# Altium PCB USB_Booster.pcbdoc
Units mil, origin at the board's own origin, x right, y up, seen from the top; angles counter-clockwise.
Board outline 2290 x 2255 mil, 2 copper layers (Top Layer, Bottom Layer); 9 components, 12 nets, 60 pads, 8 vias.
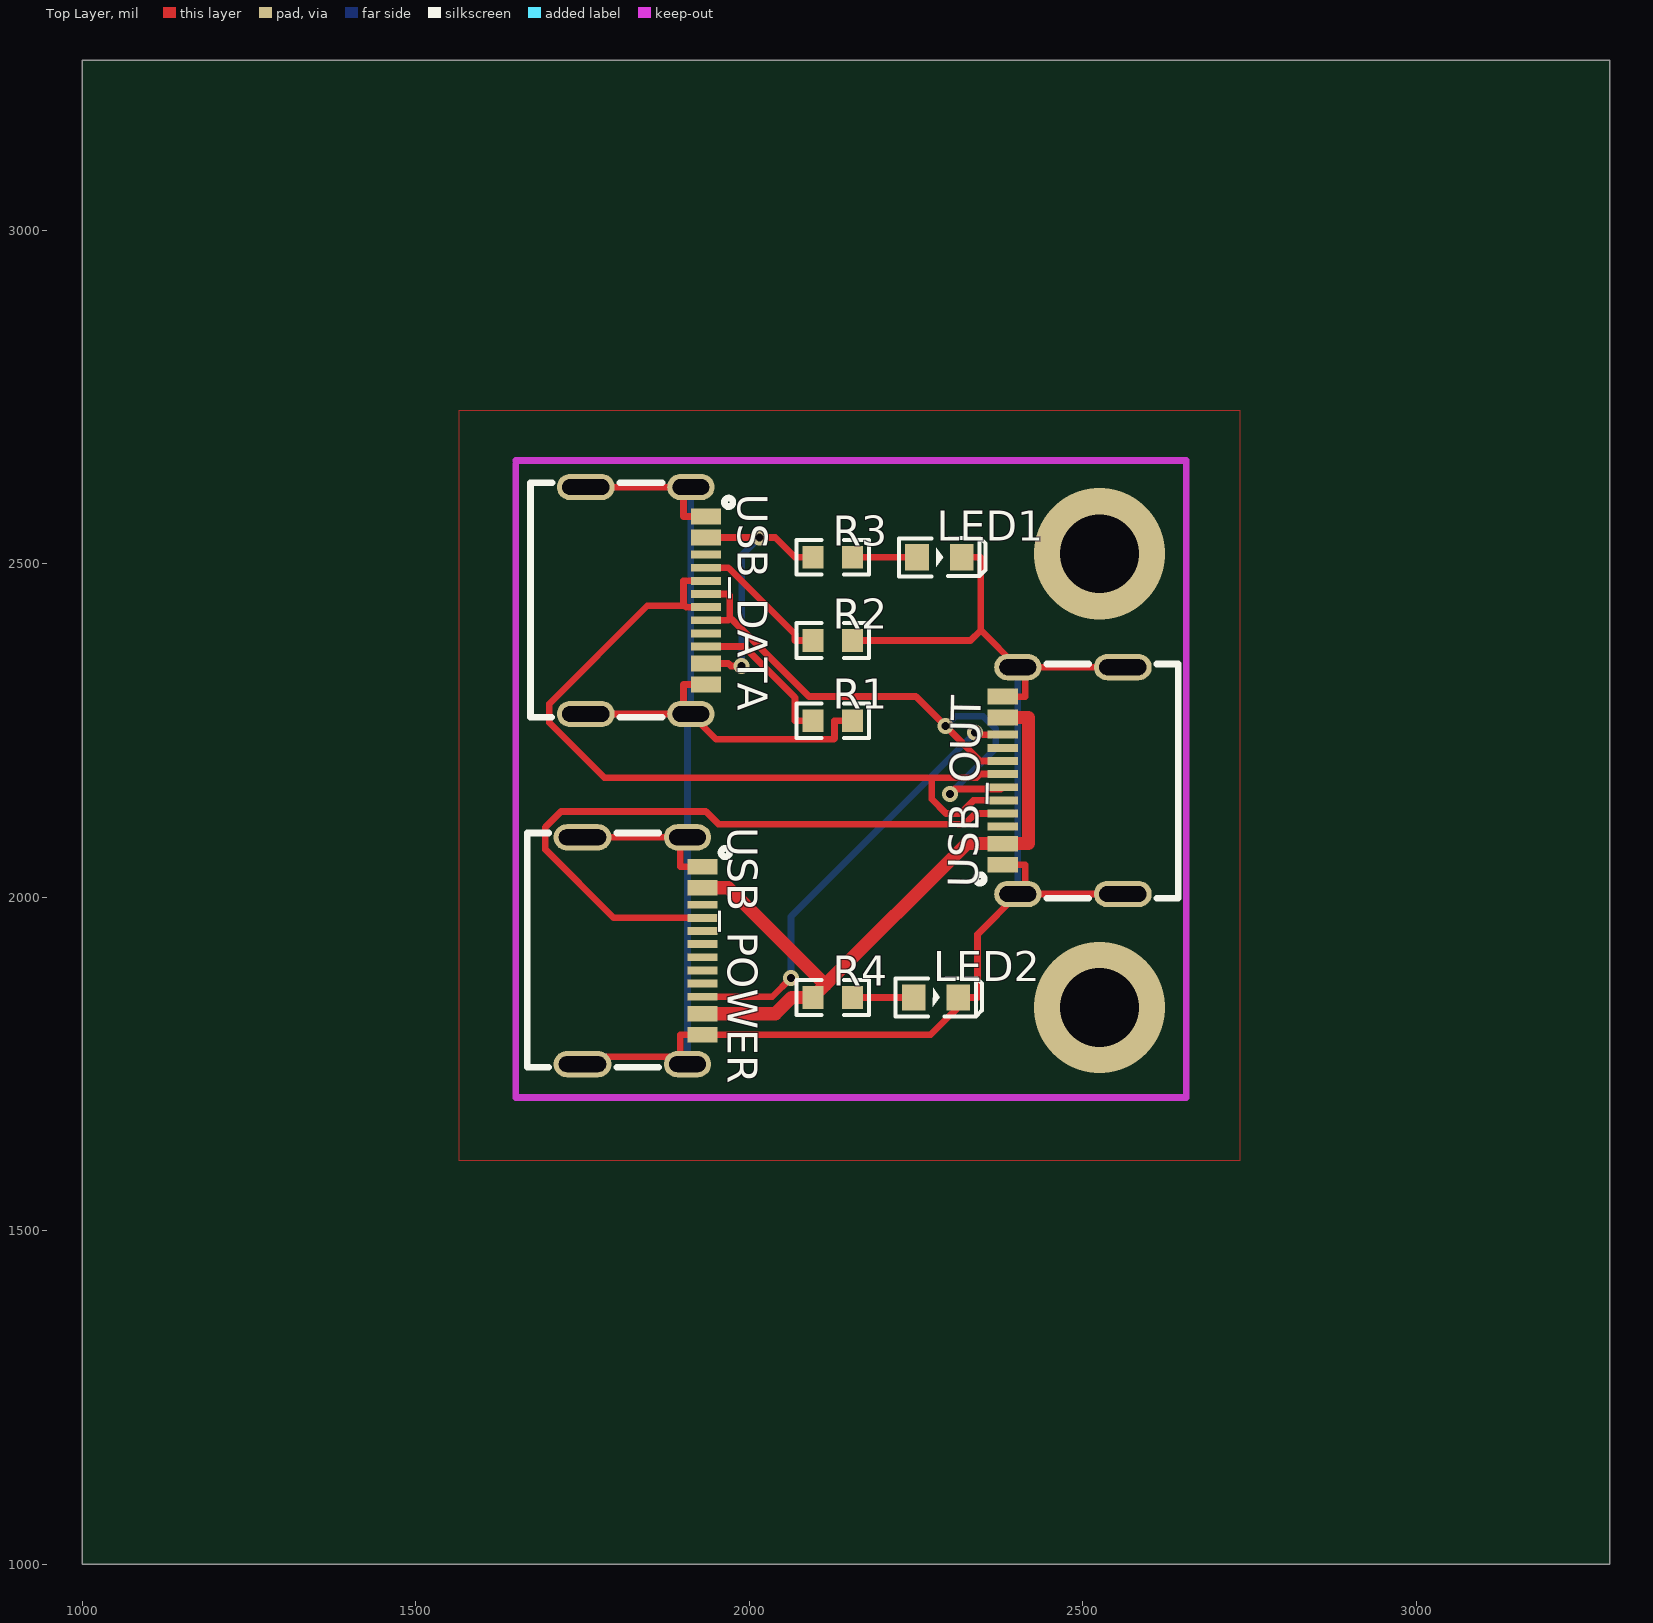
[diagram p0: Top Layer view]
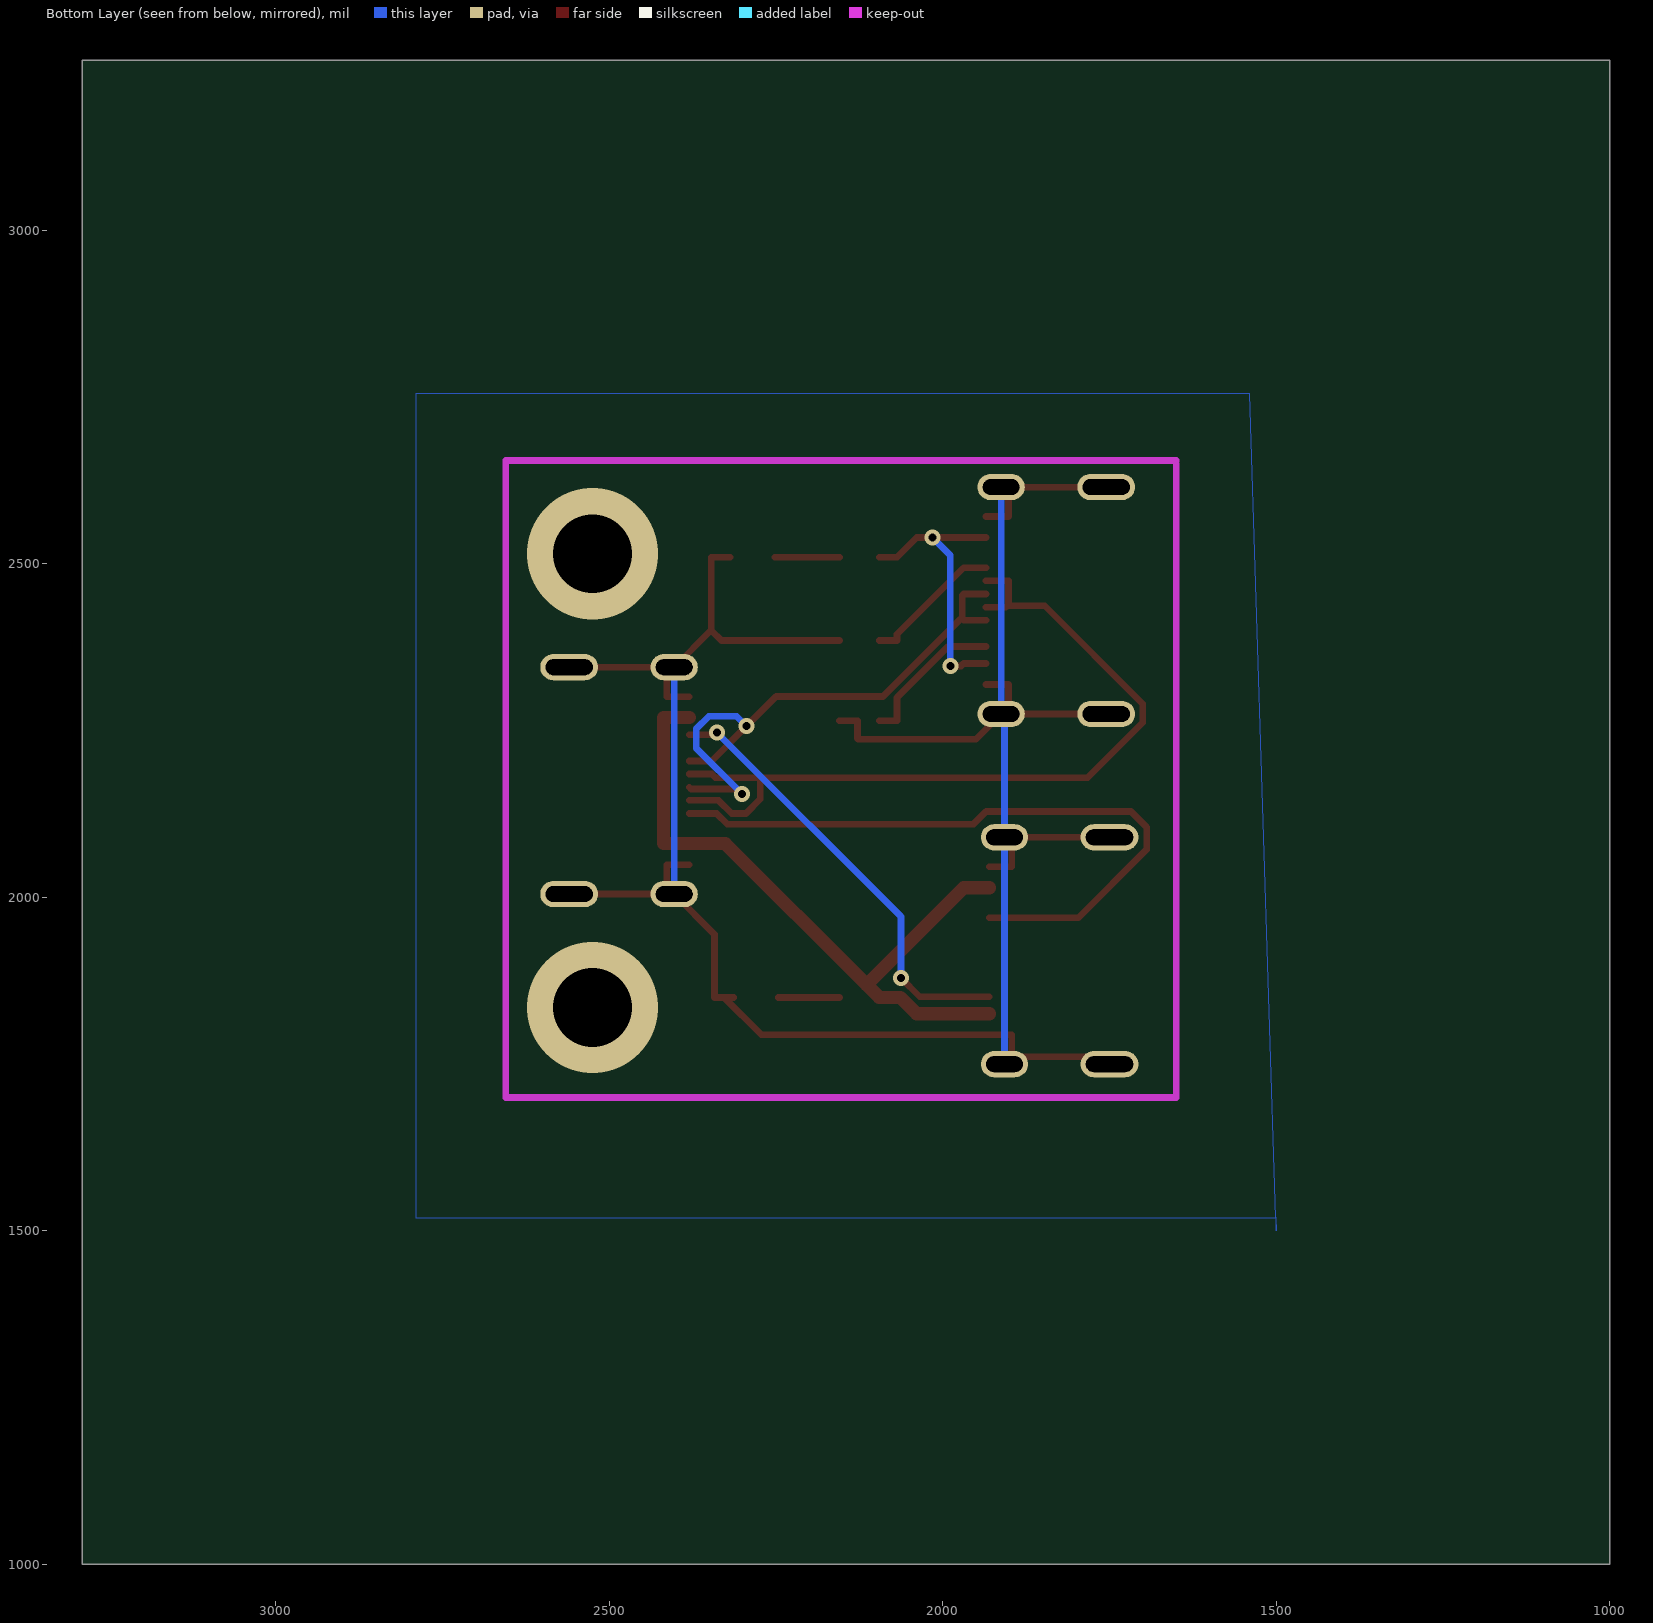
[diagram p1: Bottom Layer view, seen from below]

## Layer stack, top to bottom
Top Layer: signal copper (thickness not stored)
Dielectric: dielectric 12.6, FR-4, Dk 4.8
Bottom Layer: signal copper (thickness not stored)

## Board outline
3290,1000 1000,1000 1000,3255 3290,3255

## Components (designator, comment, footprint, x,y, rotation, side; value= is the part's Value field where it differs from the comment)
LED1 "LED-0603_B" LED0603_BLUE 2285,2510 r0 top
LED2 "LED-0603_B" LED0603_BLUE 2280,1850 r0 top
R1 "5.1k" R0603 2125,2265 r0 top
R2 "5.1k" R0603 2125,2385 r0 top
R3 "1k" R0603 2125,2510 r0 top
R4 "1k" R0603 2125,1850 r0 top
USB_DATA "GT-USB-7010B" USB-SMD_GT-USB-7010B 1845,2445 r270 top
USB_OUT "GT-USB-7010B" USB-SMD_GT-USB-7010B 2470,2175 r90 top
USB_POWER "GT-USB-7010B" USB-SMD_GT-USB-7010B 1840,1920 r270 top

## Footprints (in the part's own frame and the unit in brackets; to place one, negate y for a bottom-side part, rotate by r counter-clockwise, add the part's x,y. Pads: shape width x height; smd on the part's side, far side on the other; paste and mask are expansions set on the pad)
LED0603_BLUE [mm]
  rect 0.9x1 smd: 1(-0.85,0) 2(0.85,0)
  silkscreen extent -1.54,-0.73 1.75,0.73
R0603 [mil]
  rect 31.75x34.02 smd: 1(-29.66,0) 2(29.66,0)
  silkscreen extent -55,-26 55,26
USB-SMD_GT-USB-7010B [mm]
  rect 0.6x1.15 smd: 1(-3.2,2.287) 2(-2.4,2.287) 11(2.4,2.287) 12(3.2,2.287)
  rect 0.3x1.15 smd: 3(-1.75,2.287) 4(-1.25,2.287) 5(-0.75,2.287) 6(-0.25,2.287) 7(0.25,2.287) 8(0.75,2.287) 9(1.25,2.287) 10(1.75,2.287)
  oval 1x2.2 hole 0.6 slot 1.8 at 90 deg: 13(-4.32,-2.287) 14(4.32,-2.287)
  oval 1x1.8 hole 0.6 slot 1.4 at 90 deg: 15(-4.32,1.713) 16(4.32,1.713)
  silkscreen extent -4.48,-4.39 4.44,3.31

## Via types
v1: diameter 24.02, hole 12.01, Top Layer to Bottom Layer, tented both sides, 6 vias
v2: diameter 196.85, hole 118.11, Top Layer to Bottom Layer, tented both sides, 2 vias

## Nets (pads, with @x,y where several pads share a name; then routed paths per layer and width w, separated by ;. In a path a pad name is that pad's centre, name@x,y a point inside that pad or via, vN(x,y) a via of type N, cw(c..) or ccw(c..) an arc to the next point about the centre after c; other vN are vias at no path point)
GND: LED1.2 LED2.2 R1.2 R2.2 USB_DATA.1 USB_DATA.12 USB_DATA.13 USB_DATA.14 USB_DATA.15 USB_DATA.16 USB_OUT.1 USB_OUT.12 USB_OUT.13 USB_OUT.14 USB_OUT.15 USB_OUT.16 USB_POWER.1 USB_POWER.12 USB_POWER.13 USB_POWER.14 USB_POWER.15 USB_POWER.16 | length 3937.7
  Top Layer w10: USB_POWER.14 1760.93,1760.92 USB_POWER.16@1896.43,1760.92 ; USB_POWER.13 1885.44,2090.08 USB_POWER.15@1896.43,2079.09 ; USB_DATA.14 1890.44,2274.93 USB_DATA.16@1901.43,2285.92 ; USB_DATA.13 1890.44,2615.08 USB_DATA.15@1901.43,2604.09 ; USB_POWER.16 USB_POWER.16@1896.43,1760.92 ; USB_POWER.15 USB_POWER.15@1896.43,2079.09 ; USB_DATA.15 USB_DATA.15@1901.43,2604.09 ; USB_POWER.1 1896.43,2045.99 USB_POWER.15@1896.43,2079.09 ; USB_DATA.12 1901.43,2319.02 USB_DATA.16@1901.43,2285.92 ; USB_DATA.1 1901.43,2570.99 USB_DATA.15@1901.43,2604.09 ; R1.2 2127.79,2265 2127.79,2238.13 2126.59,2236.93 1950.42,2236.93 USB_DATA.16 USB_DATA.16@1901.43,2285.92 ; R2.2 2331.66,2385 2347.16,2400.5 ; LED2.2 LED2.2@2327.81,1850 ; LED1.2 2347.16,2510 2347.16,2400.5 ; USB_OUT.1 2413.57,2049.02 USB_OUT.15@2413.57,2015.92 ; USB_OUT.12 2413.57,2300.99 USB_OUT.16@2413.57,2334.09 ; USB_OUT.13 2424.56,2004.93 USB_OUT.15@2413.57,2015.92 ; USB_OUT.14 2424.56,2345.08 USB_OUT.16@2413.57,2334.09 ; USB_POWER.16@1896.43,1760.92 1896.43,1794.02 USB_POWER.12 2271.83,1794.02 LED2.2@2327.81,1850 ; LED2.2@2327.81,1850 2342.16,1850 2342.16,1944.51 USB_OUT.15 USB_OUT.15@2413.57,2015.92 ; 2347.16,2400.5 USB_OUT.16 USB_OUT.16@2413.57,2334.09
  Bottom Layer w10: USB_POWER.16 USB_POWER.15 1907.42,2269.93 USB_DATA.16 USB_DATA.15 ; USB_OUT.15 USB_OUT.16
  other v2: 2525,1835 2525,2515
R3_2: LED1.1 R3.2 | length 96.9
  Top Layer w10: R3.2 LED1.1
R4_2: LED2.1 R4.2 | length 91.9
  Top Layer w10: R4.2 LED2.1
S$1931: 
USB_DATA_2: R3.1 USB_DATA.2 USB_DATA.11 | length 431.2
  Top Layer w10: USB_DATA.11 1968.69,2350.51 1972.36,2346.84 v1(1988.47,2346.84) ; USB_DATA.2 v1(2015.41,2539.49) 2038.99,2539.49 2068.48,2510 R3.1
  Bottom Layer w10: v1(1988.47,2346.84) 1988.47,2512.55 v1(2015.41,2539.49)
USB_DATA_4: R2.1 USB_DATA.4 | length 211
  Top Layer w10: USB_DATA.4 1968.69,2494.21 2068.48,2394.42 2068.48,2385 R2.1
USB_DATA_5: USB_DATA.5 USB_DATA.7 USB_OUT.5 USB_OUT.7 | length 1267.6
  Top Layer w10: USB_DATA.7 1905.4,2435.16 1903.38,2437.18 1901.37,2437.18 ; USB_DATA.5 1901.43,2474.53 1901.37,2474.47 1901.37,2437.18 ; USB_OUT.5 2335.92,2145.48 2316.3,2125.86 2294.99,2125.86 2273.8,2147.05 2273.8,2179.33 ; USB_OUT.7 2346.31,2184.85 2340.79,2179.33 2273.8,2179.33 ; 1901.37,2437.18 1847.07,2437.18 1700.03,2290.14 1700.03,2262.18 1782.88,2179.33 2273.8,2179.33
USB_DATA_6: USB_DATA.6 USB_DATA.8 USB_OUT.6 USB_OUT.8 | length 904.8
  Top Layer w10: USB_DATA.8 1964.72,2415.47 1968.69,2415.47 1970.74,2417.52 ; USB_DATA.6 1968.69,2454.84 1970.74,2452.79 1970.74,2417.52 ; v1(2300.63,2155.04) 2308.04,2162.45 2377.22,2162.45 USB_OUT.6 ; USB_OUT.8 2346.31,2204.54 2346.19,2204.54 v1(2294.04,2256.69) 2249.7,2301.03 2089.6,2301.03 1973.11,2417.52 1970.74,2417.52
  Bottom Layer w10: v1(2294.04,2256.69) 2308.76,2271.41 2350.75,2271.41 2369.64,2252.52 2369.64,2224.05 v1(2300.63,2155.04)
USB_DATA_10: R1.1 USB_DATA.10 | length 226.5
  Top Layer w10: USB_DATA.10 1991.83,2376.1 2068.48,2299.45 2068.48,2265 R1.1
USB_POWER_4: USB_OUT.4 USB_POWER.4 | length 1021.5
  Top Layer w10: USB_POWER.4 1796.9,1969.21 1694.31,2071.8 1694.31,2105.26 1717.81,2128.76 1934.95,2128.76 1953.91,2109.8 2322.95,2109.8 2338.95,2125.8 USB_OUT.4
USB_POWER_10: USB_OUT.10 USB_POWER.10 | length 669
  Top Layer w10: USB_POWER.10 2034.51,1851.1 v1(2062.65,1879.24) ; v1(2338.7,2247.12) 2341.91,2243.91 2346.31,2243.91 USB_OUT.10
  Bottom Layer w10: v1(2062.65,1879.24) 2062.65,1971.07 v1(2338.7,2247.12)
VCC: R4.1 USB_OUT.2 USB_OUT.11 USB_POWER.2 USB_POWER.11 | length 1065.8
  Top Layer w19.68: USB_POWER.11 2039.21,1825.51 2063.7,1850 R4.1 2114.15,1868.81 ; USB_POWER.2 1968.47,2014.48 2114.15,1868.81 ; USB_OUT.11 2418.35,2269.5 2418.48,2269.37 2418.48,2080.65 2418.35,2080.52 2399.15,2080.52 USB_OUT.2 2325.86,2080.52 2114.15,1868.81
pads on no net: USB_DATA.3 USB_DATA.9 USB_OUT.3 USB_OUT.9 USB_POWER.3 USB_POWER.5 USB_POWER.6 USB_POWER.7 USB_POWER.8 USB_POWER.9

## Polygon pours and split planes (outlines as drawn)
GND on Bottom Layer (solid): 1500.64,1520 1500,1500 1500,1520 1500.64,1520
GND on Bottom Layer (solid): 2790,2755 2790,1520 1500.64,1520 1540,2755 2790,2755
GND on Top Layer (solid): 2735,2730 2735,1605 1565,1605 1565,2730 2735,2730

## Silkscreen, mask and mechanical layers (free items; w line width, h text height)
Document:
  lines w0.1: 2144.99,2127.49 2145.01,2127.51